# Allegro board XILINX ARTIX-7 FPGA A704 Motherboard_CON.brd
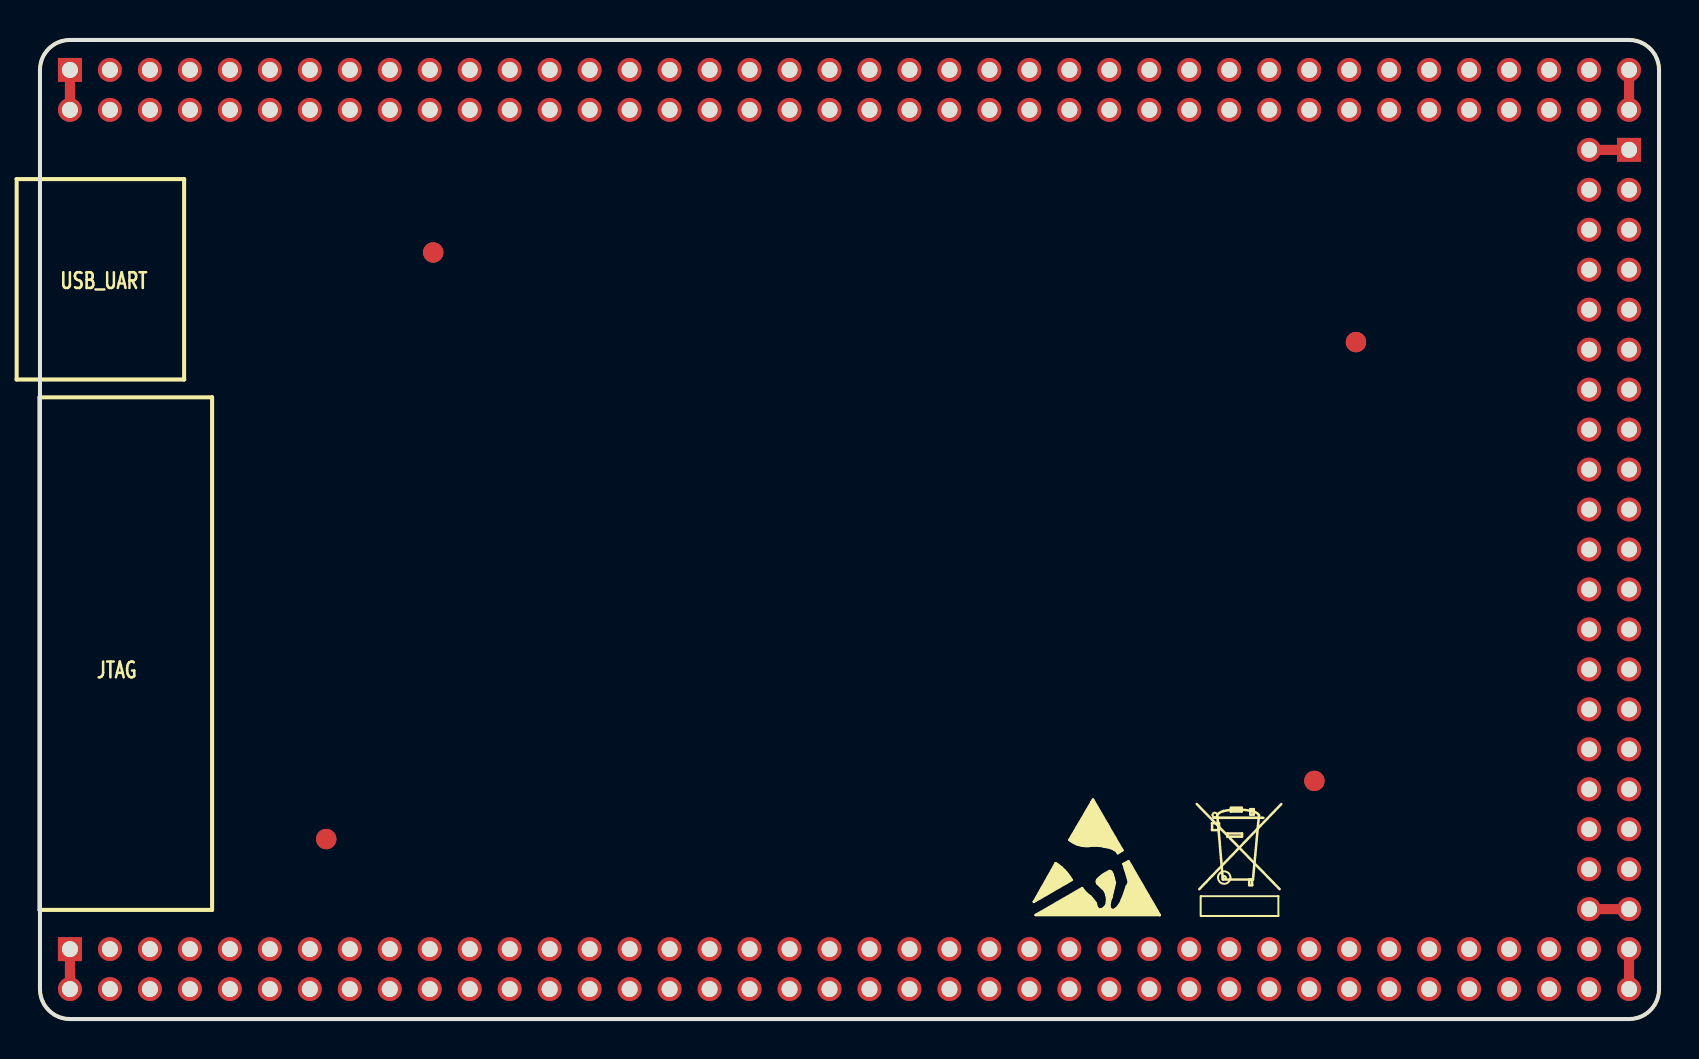
[diagram p0: board, top side]
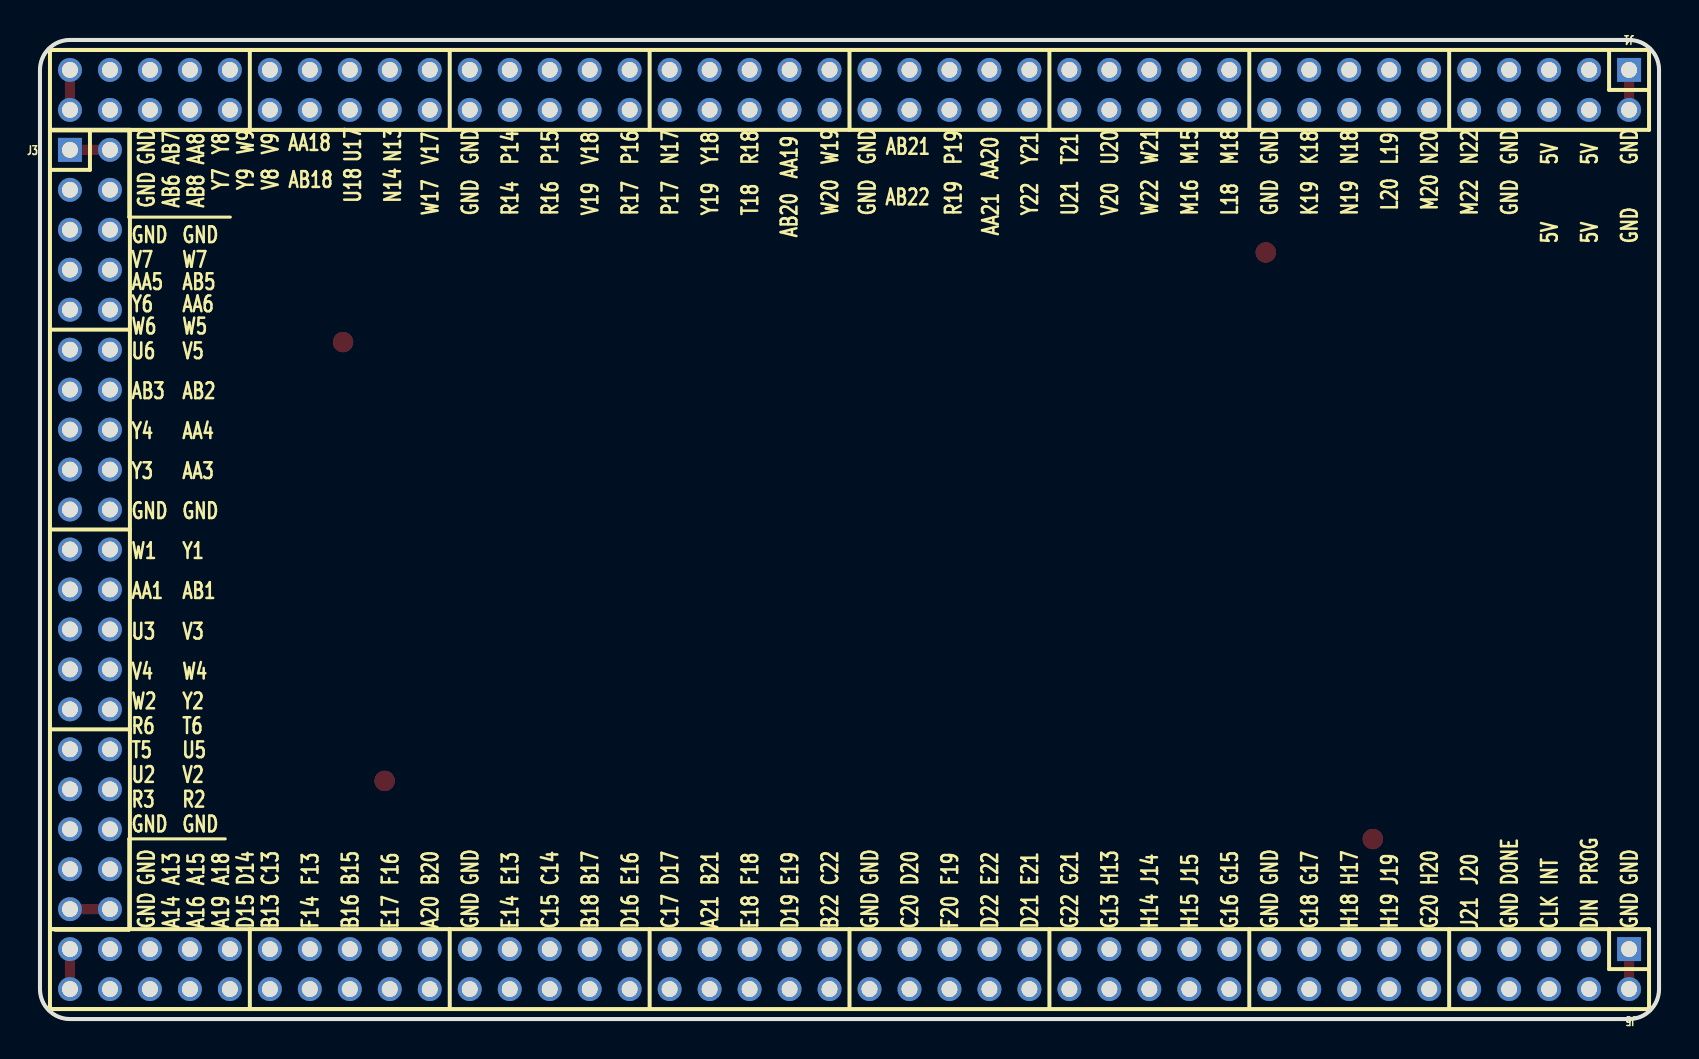
[diagram p1: board, bottom side, seen from below]

Outline 81 x 49 mm; copper layers: TOP, L2_GND, L3_POWER, BOTTOM. Coordinates in mm from the lower left corner of the outline.
Outline path: 0,47.5 arc(0.44,48.56) 1.5,49 79.5,49 arc(80.56,48.56) 81,47.5 81,1.5 arc(80.56,0.44) 79.5,0 1.5,0 arc(0.44,0.44) 0,1.5 0,47.5

## Design rules (mm)
net group DP_L1_15: nets G13_L1N_15 H13_L1P_15
net group DP_L1_16: nets F13_L1P_16 F14_L1N_16
net group DP_L2_15: nets G15_L2P_15 G16_L2N_15
net group DP_L2_16: nets E17_L2N_16 F16_L2P_16
net group DP_L2_34: nets U2_L2P_34 V2_L2N_34
net group DP_L3_15: nets H14_L3N_15 J14_L3P_15
net group DP_L3_16: nets C14_L3P_16 C15_L3N_16
net group DP_L3_34: nets R2_L3N_34 R3_L3P_34
net group DP_L4_14: nets T21_L4P_14 U21_L4N_14
net group DP_L4_15: nets G17_L4P_15 G18_L4N_15
net group DP_L4_16: nets E13_L4P_16 E14_L4N_16
net group DP_L4_34: nets W2_L4P_34 Y2_L4N_34
net group DP_L5_14: nets P19_L5P_14 R19_L5N_14
net group DP_L5_15: nets H15_L5N_15 J15_L5P_15
net group DP_L5_16: nets D16_L5N_16 E16_L5P_16
net group DP_L5_34: nets W1_L5P_34 Y1_L5N_34
net group DP_L6_15: nets H17_L6P_15 H18_L6N_15
net group DP_L6_16: nets D14_L6P_16 D15_L6N_16
net group DP_L6_34: nets U3_L6P_34 V3_L6N_34
net group DP_L7_14: nets W21_L7P_14 W22_L7N_14
net group DP_L7_16: nets B15_L7P_16 B16_L7N_16
net group DP_L7_34: nets AA1_L7P_34 AB1_L7N_34
net group DP_L8_14: nets AA20_L8P_14 AA21_L8N_14
net group DP_L8_15: nets G20_L8N_15 H20_L8P_15
net group DP_L8_16: nets B13_L8N_16 C13_L8P_16
net group DP_L8_34: nets AB2_L8N_34 AB3_L8P_34
net group DP_L9_14: nets Y21_L9P_14 Y22_L9N_14
net group DP_L9_16: nets A15_L9P_16 A16_L9N_16
net group DP_L9_34: nets AA3_L9N_34 Y3_L9P_34
net group DP_L10_14: nets AB21_L10P_14 AB22_L10N_14
net group DP_L10_16: nets A13_L10P_16 A14_L10N_16
net group DP_L10_34: nets AA5_L10P_34 AB5_L10N_34
net group DP_L11_15: nets J20_L11P_SRCC_15 J21_L11N_SRCC_15
net group DP_L11_34: nets AA4_L11N_SRCC_34 Y4_L11P_SRCC_34
net group DP_L11_SRCC_14: nets U20_L11P_SRCC_14 V20_L11N_SRCC_14
net group DP_L11P_SRCC_16: nets B17_L11P_SRCC_16 B18_L11N_SRCC_16
net group DP_L12_15: nets H19_L12N_MRCC_15 J19_L12P_MRCC_15
net group DP_L12_34: nets V4_L12P_MRCC_34 W4_L12N_MRCC_34
net group DP_L12_MRCC_14: nets W19_L12P_MRCC_14 W20_L12N_MRCC_14
net group DP_L12_MRCC_16: nets C17_L12N_MRCC_16 D17_L12P_MRCC_16
net group DP_L13_15: nets K18_L13P_MRCC_15 K19_L13N_MRCC_15
net group DP_L13_MRCC_14: nets Y18_L13P_MRCC_14 Y19_L13N_MRCC_14
net group DP_L14_15: nets L19_L14P_SRCC_15 L20_L14N_SRCC_15
net group DP_L14_34: nets T5_L14P_SRCC_34 U5_L14N_SRCC_34
net group DP_L14_SRCC_14: nets V18_L14P_SRCC_14 V19_L14N_SRCC_14
net group DP_L14_SRCC_16: nets D19_L14N_SRCC_16 E19_L14P_SRCC_16
net group DP_L15_14: nets AA19_L15P_14 AB20_L15N_14
net group DP_L15_15: nets M22_L15N_15 N22_L15P_15
net group DP_L15_16: nets E18_L15N_16 F18_L15P_16
net group DP_L15_34: nets W5_L15N_34 W6_L15P_34
net group DP_L16_14: nets V17_L16P_14 W17_L16N_14
net group DP_L16_15: nets L18_L16N_15 M18_L16P_15
net group DP_L16_16: nets A20_L16N_16 B20_L16P_16
net group DP_L16_34: nets U6_L16P_34 V5_L16N_34
net group DP_L17_14: nets AA18_L17P_14 AB18_L17N_14
net group DP_L17_15: nets N18_L17P_15 N19_L17N_15
net group DP_L17_16: nets A18_L17P_16 A19_L17N_16
net group DP_L17_34: nets R6_L17P_34 T6_L17N_34
net group DP_L18_14: nets U17_L18P_14 U18_L18N_14
net group DP_L18_15: nets M20_L18N_15 N20_L18P_15
net group DP_L18_16: nets F19_L18P_16 F20_L18N_16
net group DP_L18_34: nets AA6_L18N_34 Y6_L18P_34
net group DP_L19_14: nets P14_L19P_14 R14_L19N_14
net group DP_L19_16: nets C20_L19N_16 D20_L19P_16
net group DP_L19_34: nets V7_L19P_34 W7_L19N_34
net group DP_L20_14: nets R18_L20P_14 T18_L20N_14
net group DP_L20_16: nets B22_L20N_16 C22_L20P_16
net group DP_L20_34: nets AB6_L20N_34 AB7_L20P_34
net group DP_L21_14: nets N17_L21P_14 P17_L21N_14
net group DP_L21_16: nets A21_L21N_16 B21_L21P_16
net group DP_L21_34: nets V8_L21N_34 V9_L21P_34
net group DP_L22_14: nets P15_L22P_14 R16_L22N_14
net group DP_L22_16: nets D22_L22N_16 E22_L22P_16
net group DP_L22_34: nets AA8_L22P_34 AB8_L22N_34
net group DP_L23_14: nets N13_L23P_14 N14_L23N_14
net group DP_L23_16: nets D21_L23N_16 E21_L23P_16
net group DP_L23_34: nets Y7_L23N_34 Y8_L23P_34
net group DP_L24_14: nets P16_L24P_14 R17_L24N_14
net group DP_L24_15: nets M15_L24P_15 M16_L24N_15
net group DP_L24_16: nets G21_L24P_16 G22_L24N_16
net group DP_L24_34: nets W9_L24P_34 Y9_L24N_34
net group CLS1_POWER: nets GND
net group NG_CONFIG: nets L12_CCLK_0 N12_PROGRAM_B_0 R22_IO_DIN_14 U12_INIT_B_0
net group NG_OTHERS: nets G11_DONE_0

## Placement (name value [footprint] x y rotation side)
J1  CONN PLUG 40x2  [HDR2X40_2P0]  1.5 47.5 0 bottom
J3  CONN PLUG 20x2  [HDR2X20_2P0]  79.5 43.5 270 bottom
J5  CONN PLUG 40x2  [HDR2X40_2P0]  1.5 3.5 0 bottom
NOREF  -  []  0 1.5 0 top
NOREF#2  -  []  79.5 0 90 top
NOREF#3  -  []  0 47.5 0 top
NOREF#4  -  [unnamed#2]  19.67 38.36 0 top
NOREF#5  -  []  1.5 45.5 90 top
NOREF#6  -  []  79.5 3.5 90 top
NOREF#7  -  [unnamed#2]  63.76 11.92 0 top
NOREF#8  -  []  1.5 45.5 0 top
NOREF#9  -  [unnamed#2]  65.84 33.88 0 top
NOREF#10  -  [unnamed#2]  14.32 9.01 0 top
NOREF#11  -  []  1.5 3.5 0 top

## Library data of the parts
J1 J5 = CONN PLUG 40x2
J3 = CONN PLUG 20x2_0

## Footprints (pads in the part's own frame, mm; a bottom-side part is the same pattern mirrored in y, then rotated)
HDR2X20_2P0
  rect 1.2x1.2 hole 0.8: 1(0,0)
  round 1.2 hole 0.8: 2(0,2) 3(2,0) 4(2,2) 5(4,0) 6(4,2) 7(6,0) 8(6,2) 9(8,0) 10(8,2) 11(10,0) 12(10,2) 13(12,0) 14(12,2) 15(14,0) 16(14,2) 17(16,0) 18(16,2) 19(18,0) 20(18,2) 21(20,0) 22(20,2) 23(22,0) 24(22,2) 25(24,0) 26(24,2) 27(26,0) 28(26,2) 29(28,0) 30(28,2) 31(30,0) 32(30,2) 33(32,0) 34(32,2) 35(34,0) 36(34,2) 37(36,0) 38(36,2) 39(38,0) 40(38,2)
HDR2X40_2P0
  rect 1.2x1.2 hole 0.8: 1(0,0)
  round 1.2 hole 0.8: 2(0,2) 3(2,0) 4(2,2) 5(4,0) 6(4,2) 7(6,0) 8(6,2) 9(8,0) 10(8,2) 11(10,0) 12(10,2) 13(12,0) 14(12,2) 15(14,0) 16(14,2) 17(16,0) 18(16,2) 19(18,0) 20(18,2) 21(20,0) 22(20,2) 23(22,0) 24(22,2) 25(24,0) 26(24,2) 27(26,0) 28(26,2) 29(28,0) 30(28,2) 31(30,0) 32(30,2) 33(32,0) 34(32,2) 35(34,0) 36(34,2) 37(36,0) 38(36,2) 39(38,0) 40(38,2) 41(40,0) 42(40,2) 43(42,0) 44(42,2) 45(44,0) 46(44,2) 47(46,0) 48(46,2) 49(48,0) 50(48,2) 51(50,0) 52(50,2) 53(52,0) 54(52,2) 55(54,0) 56(54,2) 57(56,0) 58(56,2) 59(58,0) 60(58,2) 61(60,0) 62(60,2) 63(62,0) 64(62,2) 65(64,0) 66(64,2) 67(66,0) 68(66,2) 69(68,0) 70(68,2) 71(70,0) 72(70,2) 73(72,0) 74(72,2) 75(74,0) 76(74,2) 77(76,0) 78(76,2) 79(78,0) 80(78,2)
unnamed#2
  round 1.016 smd: (0,0) (0,0)

## Nets
+5V: J1.3 J1.4 J1.5 J1.6
GND: J1.1 J1.2 J1.7 J1.8 J1.19 J1.20 J1.39 J1.40 J1.59 J1.60 J1.79 J1.80 J3.1 J3.2 J3.19 J3.20 J3.39 J3.40 J5.1 J5.2 J5.8 J5.19 J5.20 J5.39 J5.40 J5.59 J5.60 J5.79 J5.80
V2_L2N_34: J3.36
V3_L6N_34: J3.26
V4_L12P_MRCC_34: J3.27
V5_L16N_34: J3.12
V7_L19P_34: J3.3
V8_L21N_34: J1.70
V9_L21P_34: J1.69
V17_L16P_14: J1.61
V18_L14P_SRCC_14: J1.53
V19_L14N_SRCC_14: J1.54
V20_L11N_SRCC_14: J1.28
A13_L10P_16: J5.77
A14_L10N_16: J5.78
A15_L9P_16: J5.75
A16_L9N_16: J5.76
A18_L17P_16: J5.73
A19_L17N_16: J5.74
A20_L16N_16: J5.62
A21_L21N_16: J5.48
AA1_L7P_34: J3.23
AA3_L9N_34: J3.18
AA4_L11N_SRCC_34: J3.16
AA5_L10P_34: J3.5
AA6_L18N_34: J3.8
AA8_L22P_34: J1.75
AA18_L17P_14: J1.67
AA19_L15P_14: J1.43
AA20_L8P_14: J1.33
AA21_L8N_14: J1.34
AB1_L7N_34: J3.24
AB2_L8N_34: J3.14
AB3_L8P_34: J3.13
AB5_L10N_34: J3.6
AB6_L20N_34: J1.78
AB7_L20P_34: J1.77
AB8_L22N_34: J1.76
AB18_L17N_14: J1.68
AB20_L15N_14: J1.44
AB21_L10P_14: J1.37
AB22_L10N_14: J1.38
B13_L8N_16: J5.70
B15_L7P_16: J5.65
B16_L7N_16: J5.66
B17_L11P_SRCC_16: J5.53
B18_L11N_SRCC_16: J5.54
B20_L16P_16: J5.61
B21_L21P_16: J5.47
B22_L20N_16: J5.42
C13_L8P_16: J5.69
C14_L3P_16: J5.55
C15_L3N_16: J5.56
C17_L12N_MRCC_16: J5.50
C20_L19N_16: J5.38
C22_L20P_16: J5.41
D14_L6P_16: J5.71
D15_L6N_16: J5.72
D16_L5N_16: J5.52
D17_L12P_MRCC_16: J5.49
D19_L14N_SRCC_16: J5.44
D20_L19P_16: J5.37
D21_L23N_16: J5.32
D22_L22N_16: J5.34
E13_L4P_16: J5.57
E14_L4N_16: J5.58
E16_L5P_16: J5.51
E17_L2N_16: J5.64
E18_L15N_16: J5.46
E19_L14P_SRCC_16: J5.43
E21_L23P_16: J5.31
E22_L22P_16: J5.33
F13_L1P_16: J5.67
F14_L1N_16: J5.68
F16_L2P_16: J5.63
F18_L15P_16: J5.45
F19_L18P_16: J5.35
F20_L18N_16: J5.36
G11_DONE_0: J5.7
G13_L1N_15: J5.28
G15_L2P_15: J5.21
G16_L2N_15: J5.22
G17_L4P_15: J5.17
G18_L4N_15: J5.18
G20_L8N_15: J5.12
G21_L24P_16: J5.29
G22_L24N_16: J5.30
H13_L1P_15: J5.27
H14_L3N_15: J5.26
H15_L5N_15: J5.24
H17_L6P_15: J5.15
H18_L6N_15: J5.16
H19_L12N_MRCC_15: J5.14
H20_L8P_15: J5.11
J14_L3P_15: J5.25
J15_L5P_15: J5.23
J19_L12P_MRCC_15: J5.13
J20_L11P_SRCC_15: J5.9
J21_L11N_SRCC_15: J5.10
K18_L13P_MRCC_15: J1.17
K19_L13N_MRCC_15: J1.18
L12_CCLK_0: J5.6
L18_L16N_15: J1.22
L19_L14P_SRCC_15: J1.13
L20_L14N_SRCC_15: J1.14
M15_L24P_15: J1.23
M16_L24N_15: J1.24
M18_L16P_15: J1.21
M20_L18N_15: J1.12
M22_L15N_15: J1.10
N12_PROGRAM_B_0: J5.3
N13_L23P_14: J1.63
N14_L23N_14: J1.64
N17_L21P_14: J1.49
N18_L17P_15: J1.15
N19_L17N_15: J1.16
N20_L18P_15: J1.11
N22_L15P_15: J1.9
P14_L19P_14: J1.57
P15_L22P_14: J1.55
P16_L24P_14: J1.51
P17_L21N_14: J1.50
P19_L5P_14: J1.35
R2_L3N_34: J3.38
R3_L3P_34: J3.37
R6_L17P_34: J3.31
R14_L19N_14: J1.58
R16_L22N_14: J1.56
R17_L24N_14: J1.52
R18_L20P_14: J1.45
R19_L5N_14: J1.36
R22_IO_DIN_14: J5.4
T5_L14P_SRCC_34: J3.33
T6_L17N_34: J3.32
T18_L20N_14: J1.46
T21_L4P_14: J1.29
U2_L2P_34: J3.35
U3_L6P_34: J3.25
U5_L14N_SRCC_34: J3.34
U6_L16P_34: J3.11
U12_INIT_B_0: J5.5
U17_L18P_14: J1.65
U18_L18N_14: J1.66
U20_L11P_SRCC_14: J1.27
U21_L4N_14: J1.30
W1_L5P_34: J3.21
W2_L4P_34: J3.29
W4_L12N_MRCC_34: J3.28
W5_L15N_34: J3.10
W6_L15P_34: J3.9
W7_L19N_34: J3.4
W9_L24P_34: J1.71
W17_L16N_14: J1.62
W19_L12P_MRCC_14: J1.41
W20_L12N_MRCC_14: J1.42
W21_L7P_14: J1.25
W22_L7N_14: J1.26
Y1_L5N_34: J3.22
Y2_L4N_34: J3.30
Y3_L9P_34: J3.17
Y4_L11P_SRCC_34: J3.15
Y6_L18P_34: J3.7
Y7_L23N_34: J1.74
Y8_L23P_34: J1.73
Y9_L24N_34: J1.72
Y18_L13P_MRCC_14: J1.47
Y19_L13N_MRCC_14: J1.48
Y21_L9P_14: J1.31
Y22_L9N_14: J1.32

## Routing (per net, layer and track width the routed paths; a pad name or vN(x,y) marks a point on that pad's centre or on a via; arc(x,y) is an arc through that point)
GND: length 12
  TOP w0.508: J5.79 J5.80 ; J1.79 J1.80 ; J3.39 J3.40 ; J1.1 J1.2 ; J5.2 J5.1 ; J3.2 J3.1

## Text on the board
Ref Des/Silkscreen Bottom: AB21 | AB22 | AB18 | AA18 | GND | W7 | AB5 | AA6 | W5 | V5 | AB2 | AA4 | AA3 | Y1 | AB1 | V3 | W4 | Y2 | T6 | U5 | V2 | R2 | V7 | AA5 | Y6 | W6 | U6 | AB3 | Y4 | Y3 | W1 | AA1 | U3 | V4 | W2 | R6 | T5 | U2 | R3 | 5V | PROG | DIN | INT | CLK | DONE | N22 | M22 | J20 | J21 | N20 | M20 | H20 | G20 | L19 | L20 | J19 | H19 | N18 | N19 | H17 | H18 | K18 | K19 | G17 | G18 | M18 | L18 | G15 | G16 | M15 | M16 | J15 | H15 | W21 | W22 | J14 | H14 | U20 | V20 | H13 | G13 | T21 | U21 | G21 | G22 | Y21 | Y22 | E21 | D21 | AA21 | AA20 | E22 | D22 | P19 | R19 | F19 | F20 | D20 | C20 | W19 | W20 | C22 | B22 | E19 | D19 | AA19 | AB20 | R18 | T18 | F18 | E18 | Y18 | Y19 | B21 | A21 | N17 | P17 | D17 | C17 | P16 | R17 | E16 | D16 | V18 | V19 | B17 | B18 | P15 | R16 | C14 | C15 | P14 | R14 | E13 | E14 | V17 | W17 | B20 | A20 | N13 | N14 | F16 | E17 | U17 | U18 | B15 | B16 | F13 | F14 | V9 | V8 | C13 | B13 | W9 | Y9 | D14 | D15 | Y8 | Y7 | A18 | A19 | AA8 | AB8 | A15 | A16 | AB7 | AB6 | A13 | A14
Ref Des/Silkscreen Top: USB_UART | JTAG
XSECTION_CHART: *  SURFACE - AIR 0 MIL | L1: TOP CONDUCTOR - COPPER 1.4 MIL | *  DIELECTRIC - FR-4 3.2 MIL | L2: L2_GND PLANE - COPPER 0.6 MIL | *  DIELECTRIC - FR-4 4 MIL | L3: L3_S1 CONDUCTOR - COPPER 0.6 MIL | *  DIELECTRIC - FR-4 10.24 MIL | L4: L4_GND PLANE - COPPER 0.6 MIL | L5: L5_S2 CONDUCTOR - COPPER 0.6 MIL | L6: L6_P PLANE - COPPER 0.6 MIL | L7: L7_GND PLANE - COPPER 0.6 MIL | L8: L8_S3 CONDUCTOR - COPPER 0.6 MIL | L9: L9_GP PLANE - COPPER 0.6 MIL | L10: BOTTOM CONDUCTOR - COPPER 1.4 MIL | DESIGN CROSS SECTION CHART | ___________________________ | TOTAL THICKNESS 60.72 MIL | 1-10
PAGE_OUTLINE: A | B | C | PRINTED WIRING BOARD
User.6: FIGURE | SIZE | 8.0 | 12.0 | 16.0 | 31.5 | 40.2 | 25.59 | 55.12x23.62 | 66.93x23.62 | DRILL CHART: TOP to BOTTOM | ALL UNITS ARE IN MILS | TOLERANCE | +0.0/-0.0 | +1.18/-1.18 | PLATED | NON-PLATED | QTY | 523 | 177 | 2 | 200 | 14
